# Altium PCB PCB1.PcbDoc
Units mm, origin at the board's own origin, x right, y up, seen from the top; angles counter-clockwise.
Board outline 22.48 x 22.48 mm, 4 copper layers (Top Layer, Internal Plane 1, Signal Layer 1, Bottom Layer), stack 0.778 mm thick; 29 components, 18 nets, 88 pads, 200 vias.
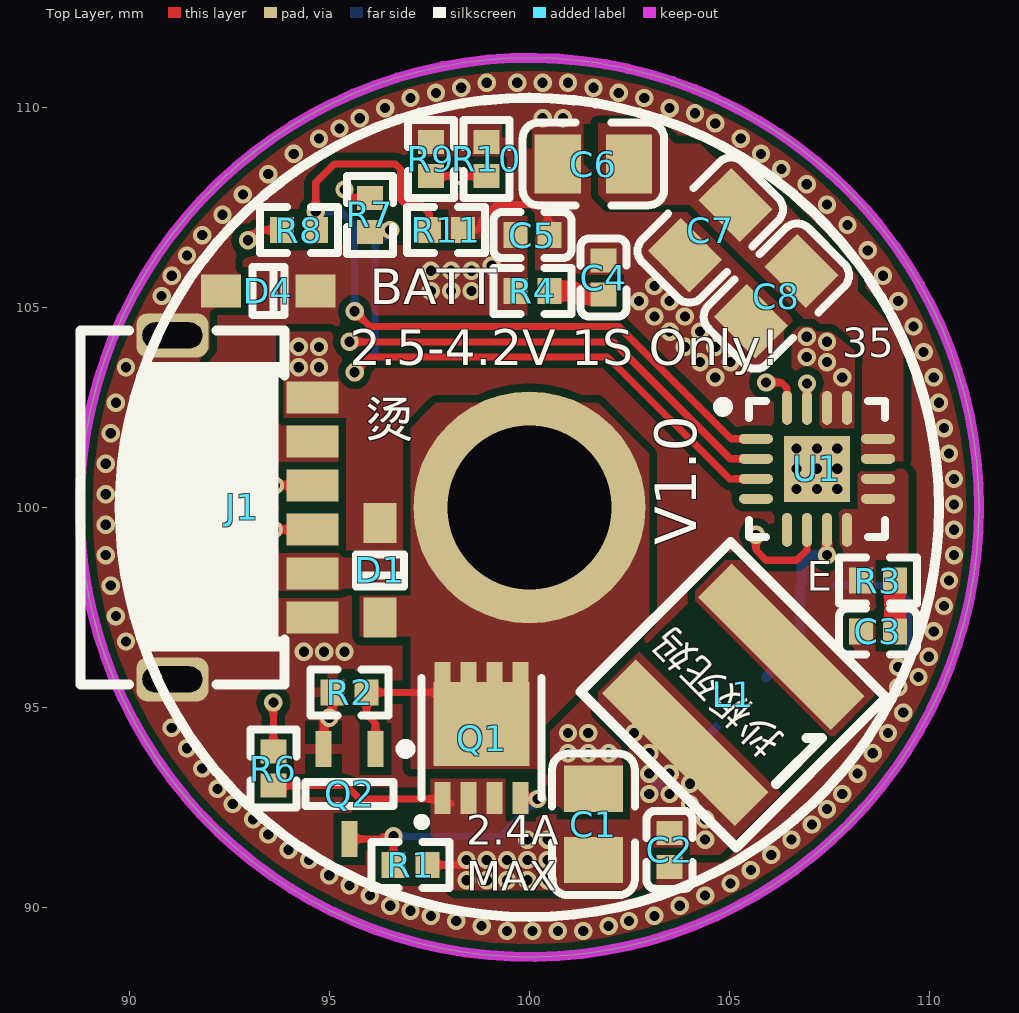
[diagram p0: Top Layer view]
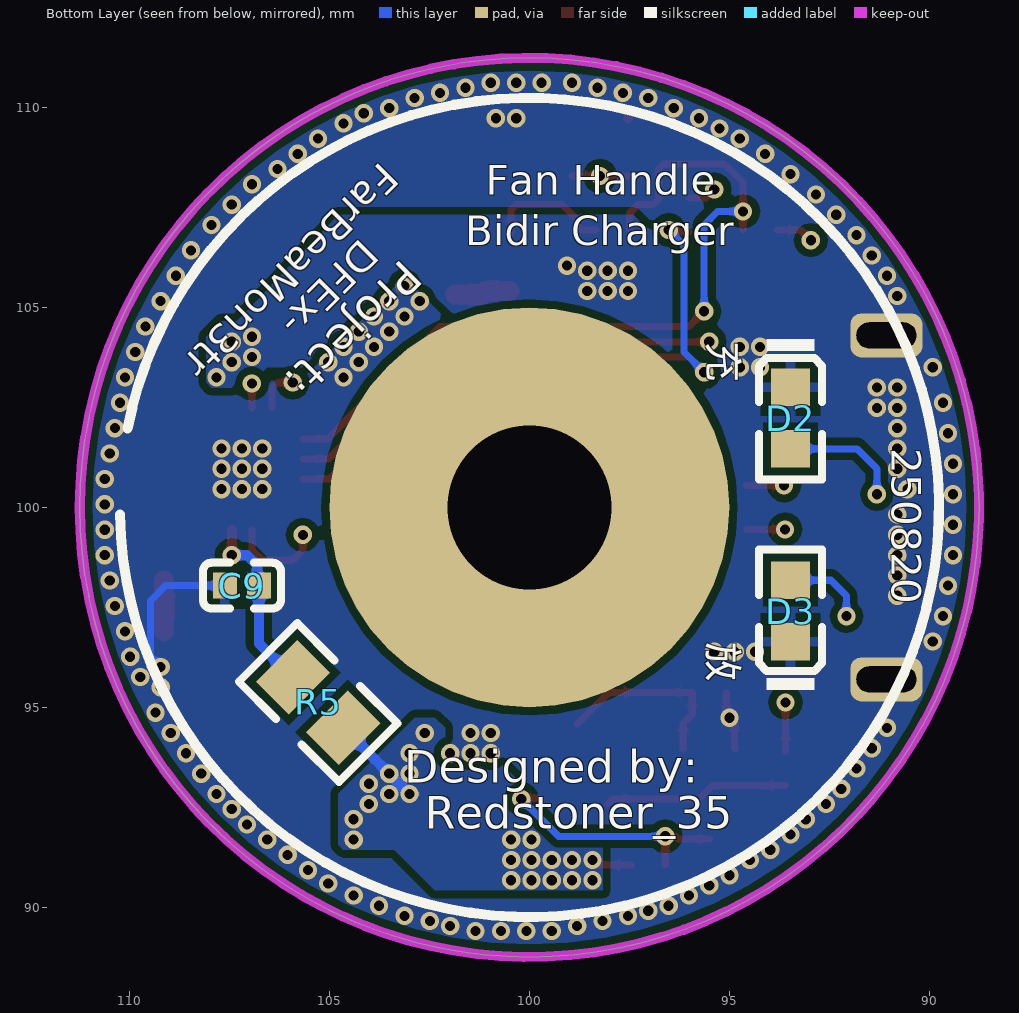
[diagram p1: Bottom Layer view, seen from below]
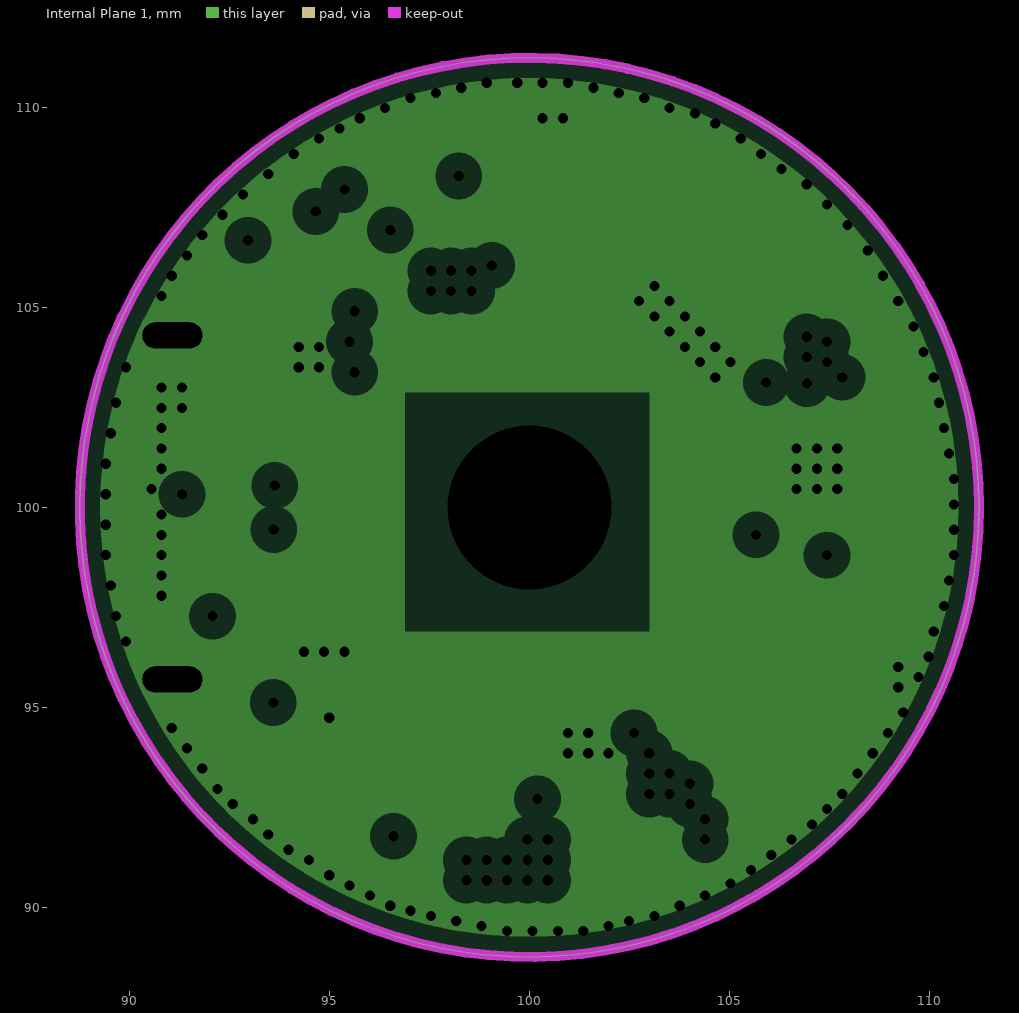
[diagram p2: Internal Plane 1, clearances drawn from the general rule]
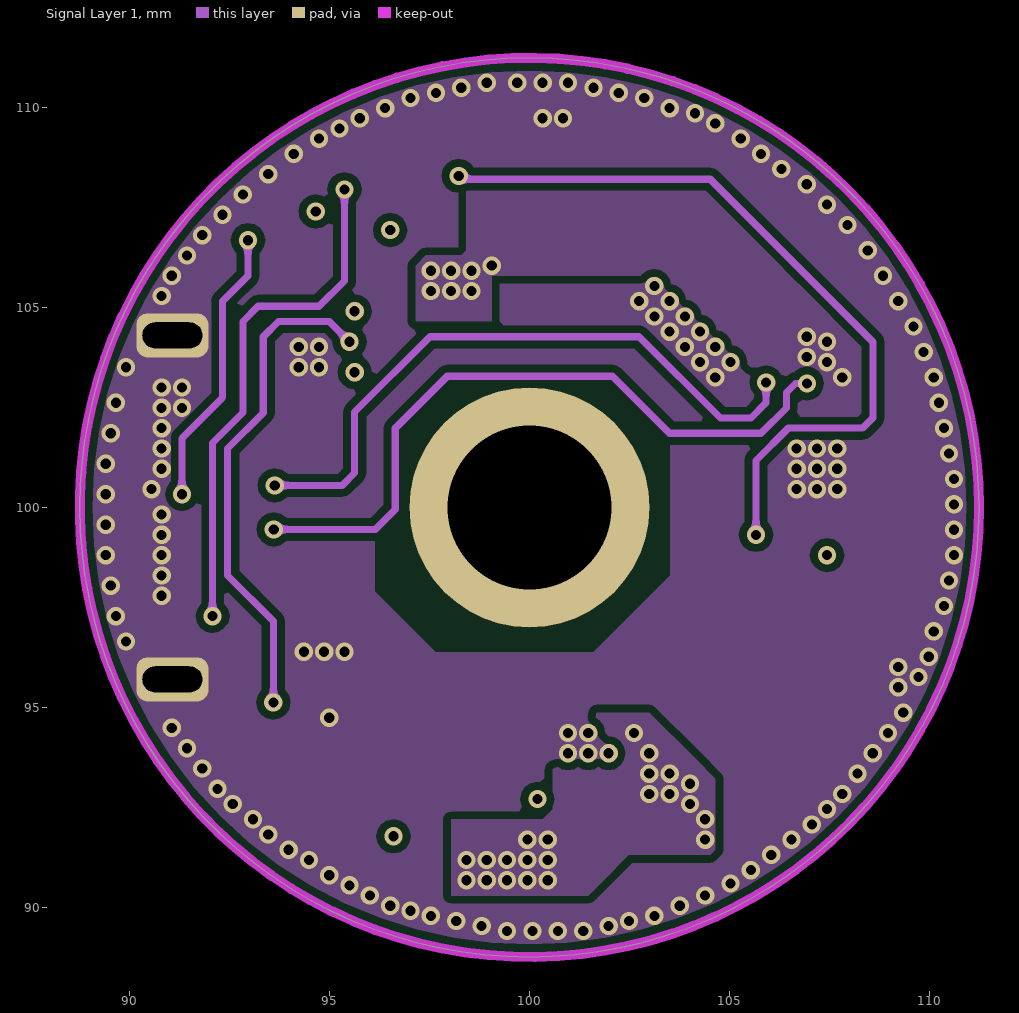
[diagram p3: Signal Layer 1]
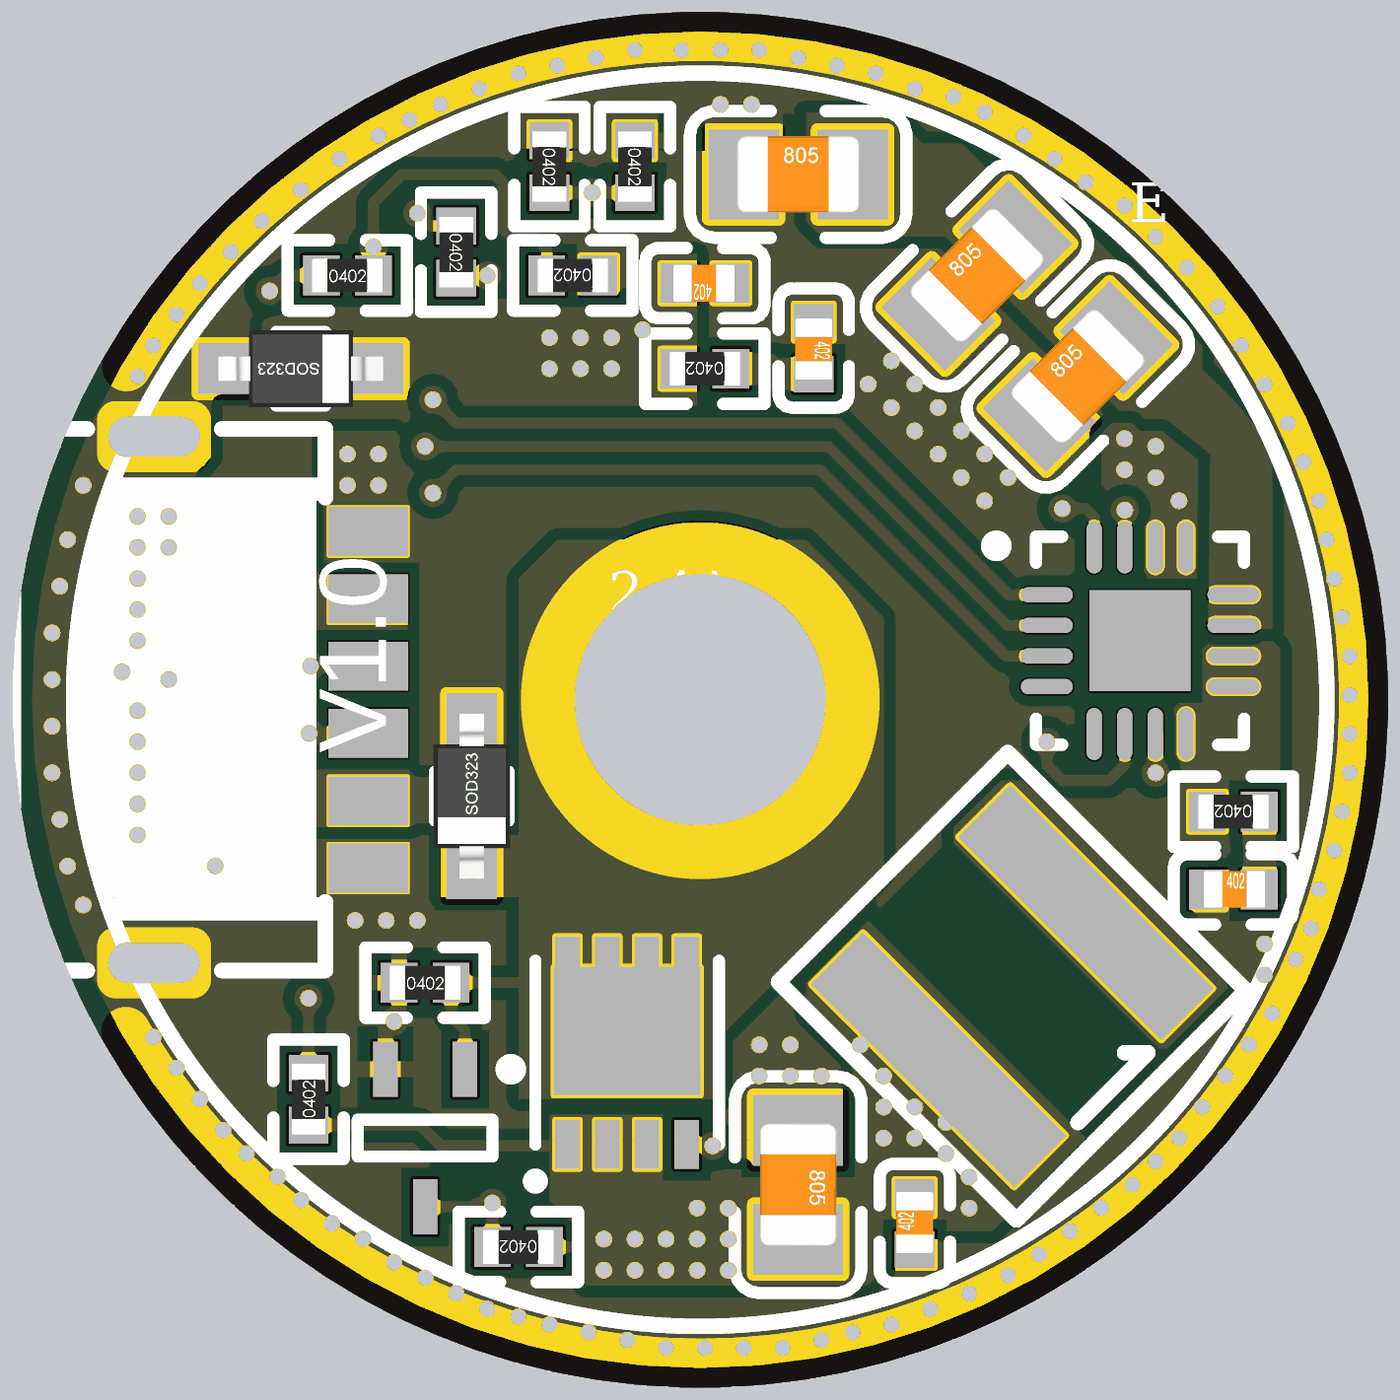
[diagram p4: 3D render of the assembled board from above, using the file's embedded part models]
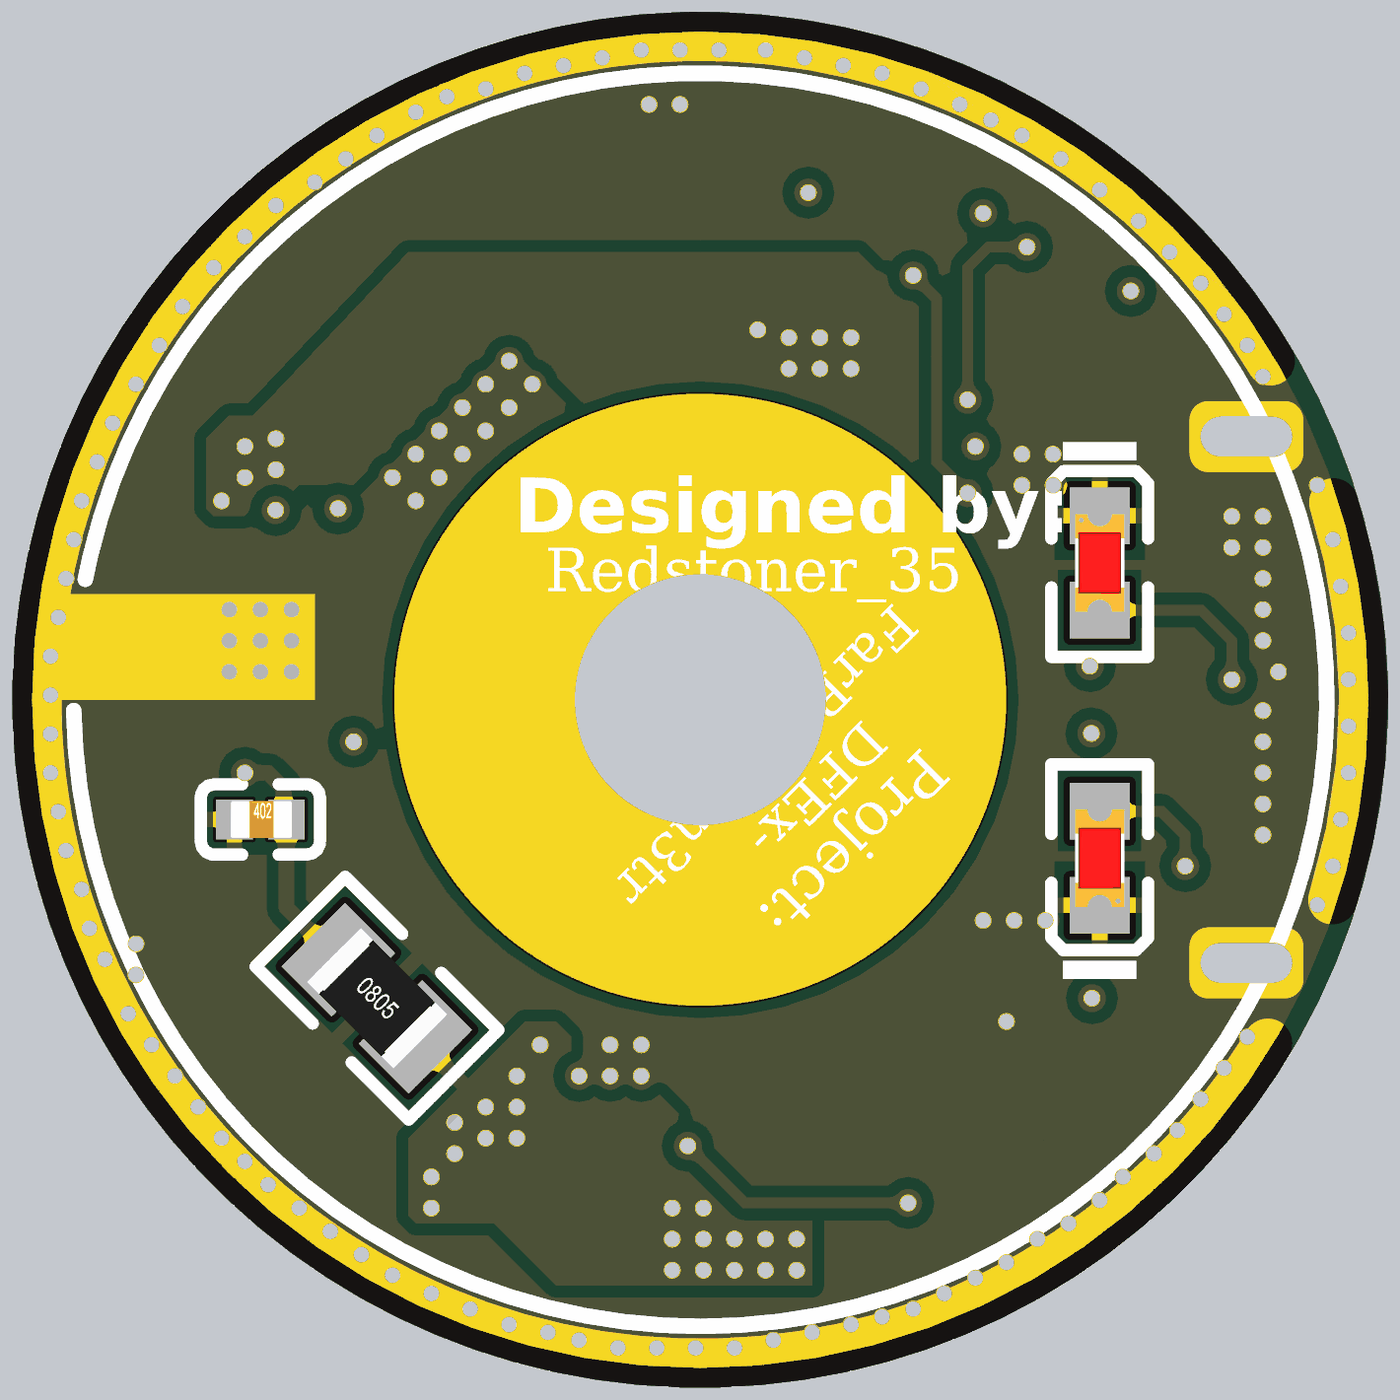
[diagram p5: 3D render of the assembled board from below, using the file's embedded part models]

## Layer stack, top to bottom
Top Solder: solder mask 0.0102, Solder Resist, Dk 3.5
Top Layer: signal copper 0.0356
Dielectric 1: core 0.254, FR-4, Dk 4.2
Internal Plane 1: plane copper 0.036
Dielectric 3: prepreg 0.127, Dk 4.2
Signal Layer 1: signal copper 0.036
Dielectric 2: core 0.254, Dk 4.2
Bottom Layer: signal copper 0.0356
Bottom Solder: solder mask 0.0102, Solder Resist, Dk 3.5

## Board outline
100,88.76 cw(c100,100) 88.76,100 cw(c100,100) 100,111.24 cw(c100,100) 111.24,100 cw(c100,100)

## Design rules (kind name [scope] priority, off if disabled: settings)
Clearance [All] p1: gap=0.191
PlaneClearance [All] p1: clearance=0.457
PlaneConnect [All] p1: planeconnectstyle=Direct reliefexpansion=0.508 reliefentries=4 reliefconductorwidth=0.254 reliefairgap=0.254
PolygonConnect PolygonConnect_1 [IsVia] p1: connectstyle=Direct reliefconductorwidth=0.254 reliefentries=4 polygonreliefangle="90 Angle" airgapwidth=0.254
PolygonConnect [All] p2: connectstyle=Relief reliefconductorwidth=0.254 reliefentries=4 polygonreliefangle="90 Angle" airgapwidth=0.254
RoomDefinition main [InComponentClass('main')] p1: confinementstyle=ConfineIn formatcopy=TRUE lockcomponents=FALSE outline 112.395,87.757 119.38,87.757 119.38,98.425 112.395,98.425
RoutingVias [All] p1: holewidth=0.711 width=1.27 viastyle="Through Hole" minholewidth=0.711 minwidth=1.27 maxholewidth=0.711 maxwidth=1.27
SolderMaskExpansion [All] p1: expansion=0.102
Width [All] p1: maxlimit=25.4 minlimit=0.178 preferedwidth=0.254
28 further rules are at their usual default settings.

## Components (designator, comment, footprint, x,y, rotation, side; value= is the part's Value field where it differs from the comment)
C1 "47uF (476) 20% 10V" 0805_C 101.6,92.075 r270 top
C2 "10uF (106) 20% 10V" 0402_C 103.505,91.44 r90 top
C3 "2.2nF (222) 10% 50V" 0402_C 108.712,96.901 r0 top
C4 "10uF (106) 20% 10V" 0402_C 101.854,105.747 r270 top
C5 "2.2uF (225) 20% 25V" 0402_C 100.076,106.807 r180 top
C6 "47uF (476) 20% 10V" 0805_C 101.6,108.585 r0 top
C7 "47uF (476) 20% 10V" 0805_C 104.521,106.934 r45 top
C8 "47uF (476) 20% 10V" 0805_C 106.172,105.283 r45 top
C9 "10uF (106) 20% 10V" 0402_C 107.188,98.044 r180 bottom
D1 "CESDB5V0D3" SOD-323 96.266,98.425 r90 top
D2 "绿灯 0603" 0603_LED_S1 93.472,102.235 r270 bottom
D3 "黄灯 0603" 0603_LED_S1 93.472,97.409 r90 bottom
D4 "CESD5V0D3" SOD-323 93.472,105.41 r180 top
J1 "TYPEC 6P L5.1" "TYPEC 6P两脚插板SMT L5.1" 92.825,100 r270 top locked
L1 "XAL5030-222MEC" FEXL0520A-***M 106.299,96.52 r225 top
Q1 "XPX80P02RX" DFN-8_L3.0-W3.0-P0.65-BL 98.806,94.234 r0 top
Q2 "2N7002KW" SC70-3 95.504,92.837 r270 top
R1 "510KΩ (5103) ±1%" 0402_R 97.028,91.059 r180 top
R2 "510KΩ (5103) ±1%" 0402_R 95.504,95.377 r0 top
R3 "4.7Ω (4R70) ±1%" 0402_R 108.712,98.171 r180 top
R4 "2.2Ω (2R20) ±1%" 0402_R 100.076,105.41 r180 top
R5 "1Ω (1R00) ±1%" 0805_R 105.283,95.123 r225 bottom
R6 "1KΩ (1001) ±1%" 0402_R 93.599,93.472 r90 top
R7 "100Ω (1000) ±1%" 0402_R 96.012,107.315 r270 top
R8 "100Ω (1000) ±1%" 0402_R 94.234,106.934 r0 top
R9 "75KΩ (7502) ±1%" 0402_R 97.536,108.712 r270 top
R10 "0402 100K B3900" 0402_R 98.933,108.712 r270 top
R11 "10KΩ (1002) ±1%" 0402_R 97.917,106.934 r180 top
U1 "IP5326_BZ" QFN33-16L-IP5326 107.188,100.965 r0 top

## Footprints (in the part's own frame and the unit in brackets; to place one, negate y for a bottom-side part, rotate by r counter-clockwise, add the part's x,y. Pads: shape width x height; smd on the part's side, far side on the other; paste and mask are expansions set on the pad)
0402_C [mm]
  rect 0.6x0.65 smd mask+0.051: 1(-0.425,0) 2(0.425,0)
  silkscreen extent -0.97,-0.58 0.97,0.58, body extent -0.48,-0.3 0.52,0.3, height 0.2
0402_R [mm]
  rect 0.6x0.65 smd mask+0.051: 1(-0.425,0) 2(0.425,0)
  silkscreen extent -0.97,-0.58 0.97,0.58, body extent -0.57,-0.27 0.58,0.28, height 0.41
0603_LED_S1 [mm]
  rect 0.93x0.98 smd: A(0.77,0) K(-0.77,0)
  silkscreen extent -1.98,-0.79 1.54,0.79, body extent -0.8,-0.4 0.8,0.4, height 0.6
0805_C [mm]
  rect 1.16x1.47 smd: 1(-0.89,0) 2(0.89,0)
  silkscreen extent -1.77,-1.04 1.77,1.04, body extent -1,-0.62 1,0.63, height 0.77
0805_R [mm]
  rect 1.16x1.47 smd: 1(-0.89,0) 2(0.89,0)
  silkscreen extent -1.77,-1.04 1.77,1.03, body extent -1,-0.63 1,0.63, height 0.49
DFN-8_L3.0-W3.0-P0.65-BL [mm]
  rect 0.4x0.8 smd paste-100 mask+0.051: 1(-0.975,-1.5) 2(-0.325,-1.5) 3(0.325,-1.5) 4(0.975,-1.5) 5(0.975,1.5) 6(0.325,1.5) 7(-0.325,1.5) 8(-0.975,1.5)
  rect 2.4x2.1 smd paste-100 mask+0.051: 8(0,0.35)
  silkscreen extent -1.6,-2.2 1.5,1.5, body extent -1.52,-1.52 1.52,1.52, height 1.2
FEXL0520A-***M [mm] "SZ CJIANG Automotive grade Inductor"
  rect 1.2x4.7 smd mask+0.05: 1(0,0) 2(3.4,0)
  silkscreen extent -0.95,-2.75 4.35,2.75, body extent -1.02,-2.79 4.44,2.79, height 2
QFN33-16L-IP5326 [mm] "QFN, 16-Leads, Body 3.00x3.00mm, Pitch 0.50mm, Thermal Pad 1.65x1.65mm, IPC Medium Density"
  oval 0.85x0.25 smd mask+0.03: 1(-1.525,0.75) 2(-1.525,0.25) 3(-1.525,-0.25) 4(-1.525,-0.75) 9(1.525,-0.75) 10(1.525,-0.25) 11(1.525,0.25) 12(1.525,0.75)
  oval 0.25x0.85 smd mask+0.03: 5(-0.75,-1.525) 6(-0.25,-1.525) 7(0.25,-1.525) 8(0.75,-1.525) 13(0.75,1.525) 14(0.25,1.525) 15(-0.25,1.525) 16(-0.75,1.525)
  rect 1.65x1.65 smd mask+0.03: 17(0,0)
  silkscreen extent -2.47,-1.7 1.7,1.7, body extent -1.55,-1.55 1.55,1.55, height 0.8
SC70-3 [mm] "3 Lead SC70(SOT-323) package for small Transistor"
  rect 0.9x0.4 smd mask+0.05: 1(-1.125,0.65) 2(-1.125,-0.65) 3(1.125,0)
  silkscreen extent -1.25,-1.1 0.3,1.53, body extent -0.67,-1.1 0.67,1.1, height 1.1
SOD-323 [mm]
  rect 1x0.83 smd: 1(1.18,0) 2(-1.18,0)
  silkscreen extent -0.4,-0.6 0.4,0.6, body extent -1.35,-0.62 1.35,0.63, height 1.1
"TYPEC 6P两脚插板SMT L5.1" [mm]
  rrect50% 1.1x1.8 hole 0.65 slot 1.5 at 90 deg mask+0.03: 0(-4.3,-1.75) 0(4.3,-1.75)
  rect 0.8x1.3 smd mask+0.03: 1(-2.75,1.75) 2(-1.65,1.75) 3(-0.55,1.75) 4(0.55,1.75) 5(1.65,1.75) 6(2.75,1.75)
  silkscreen extent -4.42,-4.05 4.43,1.05, body extent -4.44,-4.09 4.45,1.12, height 3.06

## Part data
C1 C6 C7 C8: library part "0805 22uF (226) 20% 25V", "贴片电容"
C2 C4 C9: library part "0402 10uF (106) 20% 6.3V", "贴片电容"
C3: library part "0402 2.2nF (222) 10% 50V", "贴片电容"
C5: library part "0402 1.0uF (105) 10% 25V", "贴片电容"
D1 D4: library part "SOD-323 1N4148WS T4", "5V额定工作电压，6.2V击穿电压双向TVS管，SOD-323"
D2: library part "0603 绿灯", "发光二极管"
D3: library part "0603 黄灯", "发光二极管"
J1: library part "TYPEC 6P", "TYPEC连接器 6P 2脚插板SMT 5.1长度"
L1: library part "Inductor Iron", "线艺XAL5030 2.2uH一体成型T-Core电感"
Q1: library part "SON/DFN5x6 MOS", "PDFN3x3 20V 80A 4..0mΩ [P-Ch MOSFET"
Q2: library part "2N7002 7002", "单N沟道MOSFET(场效应管)"
R1 R2: library part "0402 510KΩ (5103) 1%", "贴片电阻"
R3 R4: library part "0402 4.7KΩ (4701) 1%", "贴片电阻"
R5: library part "0805 1Ω (1R00) 1%", "贴片电阻"
R6: library part "0402 1KΩ (1001) 1%", "贴片电阻"
R7 R8: library part "0402 100Ω (1000) 1%", "贴片电阻"
R9: library part "0402 150KΩ (1503) 1%", "贴片电阻"
R10: library part "0402 100KΩ (1003) 1%", "0402贴片NTC热敏电阻 B4150 100K 1%"
R11: library part "0402 10KΩ (1002) 1%", "贴片电阻"
U1: "集成TYPC-C协议的2.4A 5V充放电移动电源SoC QFN3*3封装"

## Free pads (board coordinates)
  round 5.8 / inner round 6 / far side round 10 hole 4.1 mask+0.03: 0(100,100)

## Via types
v1: diameter 0.457, hole 0.254, Top Layer to Bottom Layer, tented both sides, 200 vias

## Nets (pads, with @x,y where several pads share a name; then routed paths per layer and width w, separated by ;. In a path a pad name is that pad's centre, name@x,y a point inside that pad or via, vN(x,y) a via of type N, cw(c..) or ccw(c..) an arc to the next point about the centre after c; other vN are vias at no path point)
3V7: C1.2 C2.2 L1.2 Q1.1 Q1.2 Q1.3 R1.1 R5.2 R6.1 | length 8.1
  Top Layer w0.178: R6.1 95.421,93.047 95.758,92.71 97.917,92.71 98.044,92.583 ; R1.1 v1@98.425,91.059
  Bottom Layer w0.254: v1@102.87,92.837 v1(102.997,92.837) R5.2
  other v1: 98.425,90.678 98.933,90.678 99.441,90.678 99.949,90.678 100.457,90.678 98.425,91.186 98.933,91.186 99.441,91.186 99.949,91.186 100.457,91.186 99.949,91.694 100.457,91.694 104.394,91.694 104.394,92.202 104.013,92.583 103.505,92.837 104.013,93.091 102.997,93.345 103.505,93.345 102.997,93.853 102.616,94.361
CC1: J1.3 U1.16 | length 18.3
  Top Layer w0.178: v1@93.599,100.584 v1(93.633,100.55) J1.3 ; v1(105.918,103.124) 106.299,103.124 106.438,102.985 U1.16
  Signal Layer 1 w0.178: v1(93.633,100.55) 95.321,100.55 95.631,100.86 95.631,102.384 97.514,104.267 102.743,104.267 104.775,102.235 105.537,102.235 105.918,102.616 v1(105.918,103.124)
CC2: J1.4 U1.15 | length 19
  Top Layer w0.178: v1@93.599,99.441 v1(93.608,99.45) J1.4 ; U1.15 v1(106.938,103.099) v1@106.948,103.11
  Signal Layer 1 w0.178: v1(93.608,99.45) 96.148,99.45 96.647,99.949 96.647,101.981 97.945,103.279 102.08,103.279 103.505,101.854 105.791,101.854 106.426,102.489 106.426,102.87 106.655,103.099 v1(106.938,103.099)
GND: C1.1 C2.1 C3.1 C4.1 C5.1 C6.1 C7.1 C8.1 C9.1 D1.1 D2.K D3.K D4.1 J1.0 J1.1 J1.6 Q2.2 R2.1 R9.1 R10.1 R11.1 U1.17 | length 8.4
  Top Layer w0.178: Q2.2 94.869,93.977 94.869,94.615 95.079,94.825 R2.1 ; R11.1 98.679,106.934 98.806,107.061 98.806,107.188 99.187,107.569 100.33,107.569 100.457,107.442 100.457,106.851 C5.1
  Bottom Layer w0.178: C9.1 109.093,98.044 109.474,97.663 109.474,96.266 v1(109.22,96.012)
  other v1: 99.441,89.408 100.076,89.408 100.711,89.408 101.346,89.408 98.806,89.535 101.981,89.535 98.171,89.662 102.489,89.662 97.536,89.789 103.124,89.789 97.028,89.916 96.52,90.043 103.759,90.043 96.012,90.297 104.394,90.297 95.504,90.551 105.029,90.596 94.996,90.805 105.537,90.932 94.488,91.186 106.045,91.313 93.98,91.44 106.553,91.694 93.472,91.821 107.061,92.075 93.091,92.202 107.442,92.456 92.583,92.583 107.823,92.837 92.202,92.964 108.204,93.345 91.821,93.472 100.965,93.853 101.473,93.853 101.981,93.853 108.585,93.853 91.44,93.98 100.965,94.361 101.473,94.361 108.966,94.361 91.059,94.488 94.996,94.742 109.347,94.869 109.22,95.504 109.728,95.758 109.982,96.266 94.361,96.393 94.869,96.393 95.377,96.393 89.916,96.647 110.109,96.901 89.662,97.282 110.363,97.536 90.805,97.79 89.535,98.044 110.49,98.171 90.805,98.298 89.408,98.806 90.805,98.806 110.617,98.806 90.805,99.314 110.617,99.441 89.408,99.568 90.805,99.822 110.617,100.076 89.408,100.33 90.551,100.457 106.68,100.457 107.188,100.457 107.696,100.457 110.617,100.711 90.805,100.965 106.68,100.965 107.188,100.965 107.696,100.965 89.408,101.092 110.49,101.346 90.805,101.473 106.68,101.473 107.188,101.473 107.696,101.473 89.535,101.854 90.805,101.981 110.363,101.981 90.805,102.489 91.313,102.489 89.662,102.616 110.236,102.616 90.805,102.997 91.313,102.997 104.648,103.251 110.109,103.251 89.916,103.505 94.234,103.505 94.742,103.505 104.267,103.632 105.029,103.632 109.855,103.886 94.234,104.013 94.742,104.013 103.886,104.013 104.648,104.013 103.505,104.394 104.267,104.394 109.601,104.521 103.124,104.775 103.886,104.775 102.743,105.156 103.505,105.156 109.22,105.156 90.805,105.283 103.124,105.537 91.059,105.791 108.839,105.791 91.44,106.299 108.458,106.426 91.821,106.807 107.95,107.061 92.329,107.315 107.442,107.569 92.837,107.823 106.934,108.077 93.472,108.331 106.299,108.458 94.107,108.839 105.791,108.839 94.742,109.22 105.283,109.22 95.25,109.474 104.648,109.601 95.758,109.728 100.33,109.728 100.838,109.728 104.14,109.855 96.393,109.982 103.505,109.982 97.028,110.236 102.87,110.236 97.663,110.363 102.235,110.363 98.298,110.49 101.6,110.49 98.933,110.617 99.695,110.617 100.33,110.617 100.965,110.617
LED1: R8.2 R11.2 U1.1 | length 20.3
  Top Layer w0.178: v1@94.615,107.442 v1(94.659,107.398) ; R8.2 v1(94.659,107.398) ; v1(95.631,104.902) 96.012,104.521 102.235,104.521 105.041,101.715 U1.1 ; R11.2 97.492,107.359 97.282,107.569 96.901,107.569 96.774,107.696 96.774,108.458 96.647,108.585 95.123,108.585 94.659,108.121 v1(94.659,107.398)
  Bottom Layer w0.178: v1(94.659,107.398) 95.294,107.398 95.631,107.061 v1(95.631,104.902)
LED2: R6.2 U1.2 | length 25.1
  Top Layer w0.178: R6.2 v1(93.599,95.123) ; v1(95.504,104.14) 102.095,104.14 105.02,101.215 U1.2
  Signal Layer 1 w0.178: v1(93.599,95.123) 93.599,97.155 92.456,98.298 92.456,101.473 93.345,102.362 93.345,104.267 93.726,104.648 94.996,104.648 v1(95.504,104.14)
LED3: R7.2 U1.3 | length 15.7
  Top Layer w0.178: v1@95.758,103.505 96.012,103.759 101.955,103.759 104.999,100.715 U1.3 ; R7.2 96.476,106.89 v1(96.52,106.934)
  Bottom Layer w0.178: v1(95.631,103.378) 96.139,103.886 96.139,106.553 v1(96.52,106.934)
NetC3_2: C3.2 R3.1 | length 1.3
  Top Layer w0.508: C3.2 R3.1
NetC4_2: C4.2 R4.1 | length 1.4
  Top Layer w0.508: R4.1 101.092,105.41 101.18,105.322 C4.2
NetD2_A: D2.A R8.1 | length 11
  Top Layer w0.178: v1(92.964,106.68) 93.218,106.934 R8.1
  Signal Layer 1 w0.178: v1(91.313,100.33) 91.313,101.727 92.329,102.743 92.329,105.156 92.964,105.791 v1(92.964,106.68)
  Bottom Layer w0.178: v1(91.313,100.33) 91.313,100.965 91.813,101.465 D2.A
NetD3_A: D3.A R7.1 | length 15.7
  Top Layer w0.178: v1(95.377,107.95) 95.587,107.74 R7.1
  Signal Layer 1 w0.178: v1(92.075,97.282) 92.075,101.613 92.837,102.375 92.837,104.648 93.218,105.029 94.742,105.029 95.377,105.664 v1(95.377,107.95)
  Bottom Layer w0.178: v1(92.075,97.282) 92.075,97.79 92.464,98.179 D3.A
NetQ1_4: Q1.4 Q2.3 R1.2 | length 6.3
  Top Layer w0.178: Q2.3 96.284,91.712 96.349,91.777 v1(96.603,91.777) R1.2 ; Q1.4 100.179,92.734 v1(100.203,92.71)
  Bottom Layer w0.178: v1(96.603,91.777) 99.27,91.777 v1(100.203,92.71)
NTC: R9.2 R10.2 U1.6 | length 23
  Top Layer w0.178: R9.2 v1(98.235,108.287) R10.2 ; v1(105.664,99.314) 105.664,98.933 105.918,98.679 106.68,98.679 106.938,98.937 U1.6
  Signal Layer 1 w0.178: v1(98.235,108.287) 98.317,108.204 104.521,108.204 108.585,104.14 108.585,102.235 108.331,101.981 106.47,101.981 105.664,101.175 v1(105.664,99.314)
SW: L1.1 R3.2 U1.8 U1.9 U1.10
VBAT: D1.2 pad.0 Q1.5 Q1.6 Q1.7 Q1.8 Q2.1 R2.2 | length 4.7
  Top Layer w0.178: Q2.1 96.154,94.6 95.929,94.825 R2.2 98.013,95.377 Q1.8@98.806,94.584
VBATSEN: C9.2 R5.1 U1.7 | length 4.5
  Top Layer w0.254: U1.7 107.438,98.81 v1(107.442,98.806)
  Bottom Layer w0.254: R5.1 106.763,96.603 C9.2 106.807,98.088 106.807,98.552 107.061,98.806 v1(107.442,98.806)
VBUS: C5.2 D4.2 J1.2 J1.5 R4.2 U1.13 U1.14
  other v1: 107.823,103.251 107.442,103.632 106.934,103.759 107.442,104.14 106.934,104.267 97.536,105.41 98.044,105.41 98.552,105.41 97.536,105.918 98.044,105.918 98.552,105.918 99.06,106.045
VOUT: C6.2 C7.2 C8.2 U1.11 U1.12
pads on no net: U1.4 U1.5

## Polygon pours and split planes (outlines as drawn)
GND on Top Layer "Component Side-No Net 1" (solid, remove dead copper, pour order 86): 88.392,85.217 89.027,85.852 107.696,85.852 108.331,85.852 111.125,88.646 112.776,90.297 112.776,109.982 112.776,110.109 107.569,115.316 106.68,116.205 90.932,116.205 88.519,116.205 86.868,114.554
GND on Top Layer "Component Side-No Net 1" (solid, remove dead copper, pour order 84): 97.409,106.299 97.282,106.426 97.282,108.966 100.965,108.966 101.219,108.712 103.251,106.68 103.251,105.283 95.677,105.283 95.631,105.329
VBUS on Top Layer "Component Side-No Net 1" (solid, remove dead copper, pour order 82): 97.155,104.806 96.717,104.368 93.954,104.368 93.954,103.404 95.885,101.473 95.564,101.152 95.564,97.282 90.678,97.282 90.551,97.409 91.186,98.044 91.186,106.553 97.282,106.553 99.568,106.553 99.568,104.902 99.441,104.775
GND on Top Layer "Component Side-No Net 1" (solid, remove dead copper, pour order 68): 87.376,107.569 87.63,107.315 93.345,107.315 93.345,103.505 92.837,102.997 92.71,102.87 85.344,102.87
VBUS on Top Layer "Component Side-No Net 1" (solid, remove dead copper, pour order 62): 97.155,104.775 99.949,104.775 99.949,107.315 99.314,107.315 99.06,107.061 99.06,106.426 98.933,106.299 98.171,106.299 97.409,106.299 97.155,106.045
GND on Top Layer "Component Side-No Net 1" (solid, remove dead copper, pour order 60): 102.37,105.812 102.348,105.791 101.473,105.791 101.346,105.791 100.965,106.172 100.838,106.299 100.203,106.299 100.203,108.204 101.346,108.204 101.346,107.95 101.907,107.39
GND on Top Layer "Component Side-No Net 1" (solid, remove dead copper, pour order 50): 87.503,96.901 87.757,96.647 92.329,96.647 92.329,94.361 91.694,93.726 87.376,93.726
GND on Top Layer "Component Side-No Net 1" (solid, remove dead copper, pour order 46): 93.726,97.79 95.758,97.79 95.758,96.266 95.758,96.139 93.853,96.139 93.218,96.139 92.456,95.377 92.075,94.996 91.186,94.996 89.789,94.996 89.535,95.25 88.392,95.25 88.392,99.822 88.519,99.949 88.519,105.283 92.583,105.283 92.837,104.902
GND on Top Layer "Component Side-No Net 1" (solid, remove dead copper, pour order 42): 100.076,107.823 100.076,111.252 101.219,111.252 101.346,111.125 101.346,107.823
GND on Top Layer "Component Side-No Net 1" (solid, remove dead copper, pour order 40): 98.552,108.712 99.314,108.712 99.314,111.76 97.028,111.76 97.028,109.22 98.044,109.22 98.171,109.22 98.298,109.093 98.298,108.712
VBAT on Top Layer "Component Side-No Net 1" (solid, remove dead copper, pour order 36): 95.758,97.79 97.409,97.79 97.409,96.774 95.758,96.774
GND on Top Layer "Component Side-No Net 1" (solid, remove dead copper, pour order 34): 94.234,103.251 97.282,103.251 97.409,103.124 97.028,102.743 97.028,99.187 97.028,98.933 95.377,98.933 95.377,101.219 95.212,101.054 93.853,101.054 93.853,102.616 93.853,103.251
GND on Top Layer "Component Side-No Net 1" (solid, remove dead copper, pour order 32): 93.853,102.489 93.853,104.267 93.98,104.394 95.123,104.394 95.25,104.267 95.25,102.362 93.853,102.362
GND on Top Layer "Component Side-No Net 1" (solid, remove dead copper, pour order 22): 102.362,105.029 102.362,106.045 102.235,106.172 101.727,106.172 101.473,106.172 101.473,107.061 101.473,107.442 103.632,107.442 104.14,107.442 105.791,105.791 106.592,104.99 106.592,104.394 106.553,104.355 105.068,102.87 104.521,102.87
VOUT on Top Layer "Component Side-No Net 1" (solid, remove dead copper, pour order 20): 104.013,107.569 106.68,104.902 107.22,104.902 107.442,104.902 108.331,104.013 108.712,103.632 109.22,103.632 109.22,104.013 108.331,104.902 107.188,106.045 107.061,106.045
VBUS on Top Layer "Component Side-No Net 1" (solid, remove dead copper, pour order 18): 107.188,101.981 108.204,101.981 108.299,102.076 108.299,104.394 107.188,104.394 107.061,104.521 106.934,104.521 106.68,104.521 106.553,104.394 106.553,103.632 106.553,103.505 106.807,103.251 107.061,102.997 107.188,102.997
VOUT on Top Layer "Component Side-No Net 1" (solid, remove dead copper, pour order 16): 101.727,109.601 101.727,107.95 101.727,107.823 101.854,107.696 101.981,107.569 103.759,107.569 104.013,107.569 107.188,104.394 108.331,104.013 108.299,100.916 109.298,100.916 109.347,100.965 109.347,102.87 109.347,103.759 109.347,104.14 108.712,104.902 108.204,105.41 108.204,105.791 107.823,106.172 105.283,108.712 104.775,108.712 104.648,108.712 104.267,109.093 103.759,109.093 103.632,109.093 103.124,109.601
GND on Top Layer "Component Side-No Net 1" (solid, remove dead copper, pour order 14): 107.696,96.52 107.696,97.316 107.797,97.417 108.684,97.417 108.684,96.548 108.839,96.393 110.363,96.393 110.363,94.869 110.109,94.615 108.204,94.615 108.204,95.377 107.315,96.266
SW on Top Layer "Component Side-No Net 1" (solid, remove dead copper, pour order 12): 107.569,94.234 108.712,95.377 108.331,95.631 107.95,96.012 107.95,96.52 107.95,97.282 108.712,97.282 108.712,98.425 108.712,98.552 108.839,98.679 109.347,98.679 109.474,98.806 109.474,100.838 109.347,100.965 108.331,100.965 108.204,100.838 108.204,100.33 108.204,100.076 108.077,99.949 107.823,99.949 107.696,99.822 107.696,98.933 107.696,98.679 107.569,98.552 107.188,98.552 105.41,98.552 105.283,98.679 105.029,98.679 104.902,98.679 104.648,98.425 104.14,97.917 104.14,97.663
GND on Top Layer "Component Side-No Net 1" (solid, remove dead copper, pour order 10): 103.124,89.154 103.124,91.186 103.251,91.313 103.378,91.186 105.029,91.186 105.029,89.535 105.283,89.281
GND on Top Layer "Component Side-No Net 1" (solid, remove dead copper, pour order 8): 100.387,92.329 100.33,92.386 100.33,94.488 101.219,95.377 102.235,95.377 102.235,94.869 103.124,93.98 103.124,92.329
VBAT on Top Layer "Component Side-No Net 1" (solid, remove dead copper, pour order 6): 97.028,96.774 97.028,101.981 97.409,102.362 97.663,102.616 100.076,102.616 101.727,102.616 102.997,101.346 102.997,99.187 102.997,97.155 101.727,95.885 100.33,94.488 100.33,93.599 100.33,93.472 99.314,93.472 97.028,93.472
3V7 on Top Layer "Component Side-No Net 1" (solid, remove dead copper, pour order 4): 100.203,90.424 102.235,90.424 102.743,90.424 102.87,90.551 102.997,90.678 102.997,91.059 102.997,91.186 103.124,91.313 103.759,91.313 104.775,91.313 106.299,92.837 102.743,96.393 102.362,96.012 101.727,95.377 101.727,95.123 101.727,94.869 102.235,94.361 102.489,94.107 102.489,93.345 102.489,92.456 102.362,92.329 101.6,92.329 99.441,92.329 99.441,93.218 97.536,93.218 97.536,92.202 97.536,91.821 98.044,91.313 98.044,90.424
VBUS on Bottom Layer "Component Side-No Net 1" (solid, remove dead copper, pour order 92): 96.393,103.251 98.806,103.251 100.076,104.521 99.695,104.902 99.695,107.823 95.758,107.823 95.504,107.569 95.329,107.394 95.329,103.076
GND on Bottom Layer "Component Side-No Net 1" (solid, remove dead copper, pour order 90): 89.408,87.122 109.093,87.122 110.998,89.027 113.157,91.186 113.157,104.902 113.157,109.22 110.363,112.014 109.22,113.157 102.743,113.157 91.694,113.157 91.186,112.649 86.741,108.204 86.106,108.204
3V7 on Bottom Layer "Component Side-No Net 1" (solid, remove dead copper, pour order 56): 98.171,90.424 102.362,90.424 103.378,91.44 104.394,91.44 104.648,91.44 104.775,91.567 104.775,92.202 104.775,92.837 103.759,93.853 102.87,94.742 102.362,94.742 102.108,94.488 102.108,94.234 102.108,93.98 101.981,93.853 100.965,93.853 100.33,93.218 100.203,93.091 100.203,92.71 99.27,91.777 98.171,91.777
GND on Bottom Layer "Component Side-No Net 1" (solid, remove dead copper, pour order 54): 84.201,107.188 86.106,105.283 92.71,105.283 92.71,94.869 92.456,94.615 92.202,94.361 87.63,94.361
VBUS on Bottom Layer "Component Side-No Net 1" (solid, remove dead copper, pour order 26): 97.155,106.172 97.155,107.061 97.409,107.315 102.489,107.315 103.505,107.315 103.886,107.315 104.775,107.315 107.061,104.902 107.315,104.648 107.696,104.648 108.077,104.267 108.077,103.251 108.077,103.124 107.95,102.997 107.315,102.997 107.061,102.997 106.68,103.378 106.553,103.505 106.172,103.505 105.664,103.505 105.283,103.886 103.378,105.791 102.87,105.791 102.235,105.156 101.981,104.902 101.981,104.013 100.838,104.267 100.203,104.394 99.314,103.505 97.155,103.505
VBUS on Signal Layer 1 "Component Side-No Net 1" (solid, remove dead copper, pour order 94): 105.029,104.521 105.664,103.886 105.664,101.175 109.049,101.175 109.601,101.727 109.347,101.981 109.347,104.394 108.331,104.394 106.934,105.791 106.553,105.41 105.156,105.41
GND on Signal Layer 1 "Component Side-No Net 1" (solid, remove dead copper, pour order 88): 85.471,113.792 86.106,113.157 111.506,113.157 111.506,112.395 114.3,109.601 112.014,107.315 112.014,90.551 107.315,90.551 104.902,88.138 104.775,88.265 88.138,88.265
GND on Signal Layer 1 "Component Side-No Net 1" (solid, remove dead copper, pour order 78): 85.471,106.045 86.286,105.23 92.806,105.23 92.806,94.711 92.202,94.107 91.44,93.345 84.963,93.345
3V7 on Signal Layer 1 "Component Side-No Net 1" (solid, remove dead copper, pour order 74): 98.044,91.694 98.044,90.297 101.473,90.297 101.854,90.678 102.489,91.313 104.267,91.313 104.521,91.313 104.648,91.44 104.648,92.329 104.648,93.218 104.14,93.726 102.997,94.869 102.489,94.869 100.838,94.869 100.584,94.615 100.584,93.472 100.584,92.456 100.33,92.202 99.822,92.202 98.044,92.202 98.044,92.075
VBUS on Signal Layer 1 "Component Side-No Net 1" (solid, remove dead copper, pour order 44): 106.426,103.505 107.188,103.505 107.569,103.124 107.823,102.87 108.585,102.87 108.585,104.14 106.934,105.791 104.521,108.204 99.06,108.204 98.679,108.204 98.466,107.991 98.425,107.95 98.425,106.68 98.425,106.426 98.298,106.299 97.409,106.299 97.155,106.045 97.155,104.775 97.155,104.648 97.917,104.648 99.06,104.648 99.06,105.791 100.584,105.791 103.251,105.791 103.378,105.664 105.537,103.505
GND on Internal Plane 1 (split plane): 161 vertices, not listed, extent 89.269,89.269 110.731,110.731

## Keep-outs
Keep-Out Layer:
  circle w0.254: c100,100 r11.24

## Other copper
Top Layer:
  pour cut-out: 104.14,97.663 104.013,97.663 102.743,96.393 106.426,92.71 107.696,93.98
Signal Layer 1:
  pour cut-out: 96.647,101.981 97.945,103.279 102.08,103.279 103.505,101.854 103.505,98.298 101.6,96.393 97.663,96.393 96.148,97.908 96.148,99.45 96.647,99.949
Internal Plane 1 (plane layer: these items are gaps in the copper):
  rectangle: 96.901,96.901 102.997,102.87

## Silkscreen, mask and mechanical layers (free items; w line width, h text height)
Top Overlay:
  circle w0.254: c100,100 r10.24
  rectangle: 93.218,96.393 93.875,96.774
  rectangle: 93.091,103.251 93.875,103.632
  rectangle: 90.297,96.774 90.805,97.155
  rectangle: 90.17,97.155 90.424,97.536
  rectangle: 90.043,97.536 90.424,98.044
  rectangle: 89.916,98.044 90.424,99.187
  rectangle: 90.17,102.235 90.424,102.87
  rectangle: 90.297,102.235 90.551,103.378
  rectangle: 90.043,101.6 90.805,102.489
  rectangle: 89.789,101.219 91.186,101.727
  rectangle: 89.789,100.33 92.202,101.219
  rectangle: 89.789,98.679 92.075,100.584
  rectangle: 90.424,96.393 93.726,103.632
  lines w0.254: 106.172,93.091 107.315,94.234 106.934,94.234
  text "BATT" at 96.012,104.775 h1.52
  text "35" at 107.823,103.505 h1.27
  text "2.5-4.2V 1S Only!" at 95.504,103.251 h1.52
  text "烫" at 95.885,101.473 h1.52
  text "V1.0" at 104.521,99.06 h1.78 r90
  text "E" at 106.934,97.663 h1.27
  text "抄板死妈" at 106.553,94.361 h1.27 r135
  text "2.4A" at 98.425,91.313 h1.27
  text "MAX" at 98.425,90.17 h1.27
Bottom Overlay:
  lines w0.254: 110.049,101.969 ccw(c100,100) 110.238,99.822
  text "FarBeaMon3tr" at 103.886,108.839 h1.25 r135
  text "Fan Handle" at 101.092,107.569 h1.27
  text "DFEx-" at 104.394,106.934 h1.25 r135
  text "Project:" at 103.378,106.426 h1.4 r135
  text "Bidir Charger" at 101.6,106.299 h1.27
  text "充" at 95.758,104.14 h1.27 r90
  text "250820" at 91.186,101.473 h1.27 r90
  text "放" at 95.758,96.647 h1.27 r90
  text "Designed by:" at 103.124,92.837 h1.4
  text "Redstoner_35" at 102.616,91.694 h1.4
Top Solder:
  lines w0.8: 90.612,94.58 ccw(c100,100) 90.624,105.441
Bottom Solder:
  rectangle: 106.299,100 111.252,101.727
  lines w0.8: 89.65,103.221 ccw(c100,100) 89.665,96.728 ; 90.68,105.536 cw(c100,100) 110.638,97.916 ; 90.725,94.389 ccw(c100,100) 110.84,100